# Altium PCB atWork_LCD.PcbDoc
Units mm, origin at the board's own origin, x right, y up, seen from the top; angles counter-clockwise.
Board outline 85.1 x 50.02 mm, 2 copper layers (Top Layer, Bottom Layer); 8 components, 15 nets, 44 pads, 7 vias.
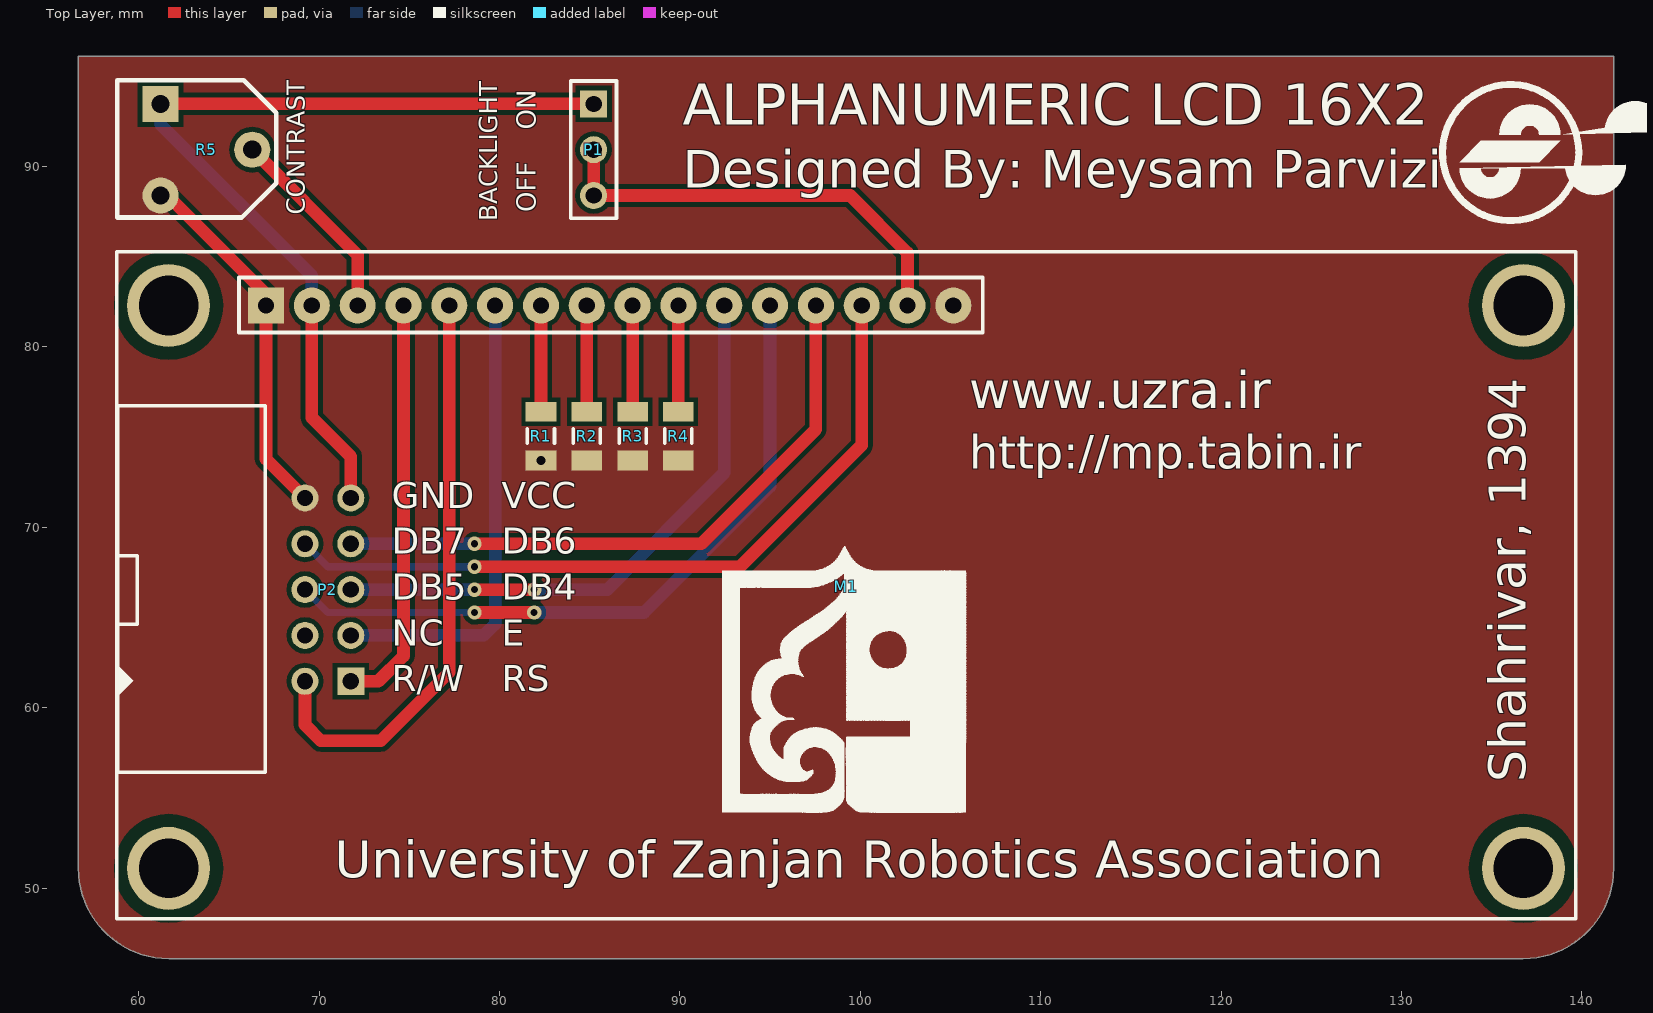
[diagram p0: Top Layer view]
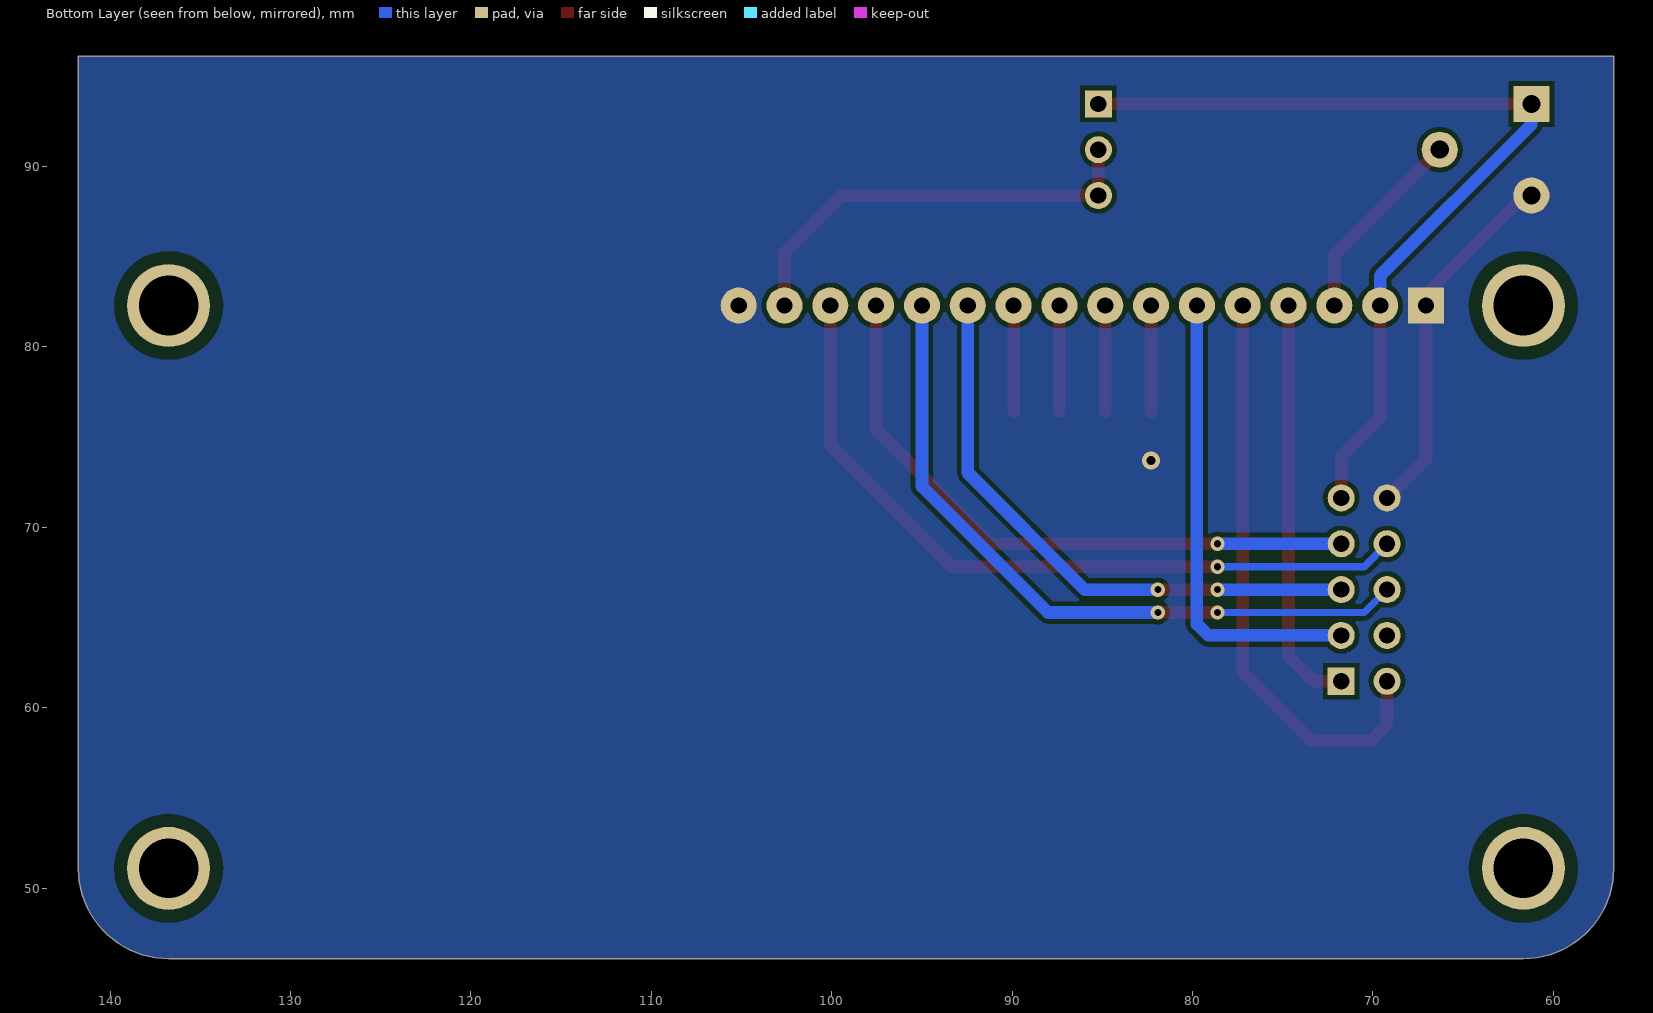
[diagram p1: Bottom Layer view, seen from below]

## Layer stack, top to bottom
Top Solder: solder mask 0.0102, Solder Resist, Dk 3.5
Top Layer: signal copper 0.0356
Dielectric 1: dielectric 0.32, FR-4, Dk 4.8
Bottom Layer: signal copper 0.0356
Bottom Solder: solder mask 0.0102, Solder Resist, Dk 3.5

## Board outline
56.656,51.096 ccw(c61.656,51.096) 61.656,46.096 136.756,46.096 ccw(c136.756,51.096) 141.756,51.096 141.756,96.115 56.656,96.115

## Design rules (kind name [scope] priority, off if disabled: settings)
Clearance [All] p1: gap=0.254
PolygonConnect [All] p1: connectstyle=Direct reliefconductorwidth=0.254 reliefentries=4 polygonreliefangle="90 Angle" airgapwidth=0.254
RoutingVias [All] p1: holewidth=0.711 width=1.27 viastyle="Through Hole" minholewidth=0.711 minwidth=1.27 maxholewidth=0.711 maxwidth=1.27
SolderMaskExpansion [All] p1: expansion=0.102
Width [All] p1: maxlimit=2 minlimit=0.254 preferedwidth=0.7 minimp=50.000000 maximp=50.000000 favimp=50.000000
30 further rules are at their usual default settings.

## Components (designator, comment, footprint, x,y, rotation, side; value= is the part's Value field where it differs from the comment)
M1 "LCD 16x2" LCD16PIN 67.056,82.296 r0 top
P1 "Header 3" HDR1X3 85.217,93.472 r270 top
P2 "Box 5X2" BOX2X5_RIGHT 69.215,66.548 r270 top
R1 "Res1" C1206 82.296,75.057 r270 top
R2 "Res1" C1206 84.836,75.057 r270 top
R3 "Res1" C1206 87.376,75.057 r270 top
R4 "Res1" C1206 89.916,75.057 r270 top
R5 "RPot" RPOT 61.214,93.472 r270 top

## Footprints (in the part's own frame and the unit in brackets; to place one, negate y for a bottom-side part, rotate by r counter-clockwise, add the part's x,y. Pads: shape width x height; smd on the part's side, far side on the other; paste and mask are expansions set on the pad)
BOX2X5_RIGHT [mm] "Box Header; 5x2 Position"
  rect 1.5x1.5 hole 0.9: 1(5.08,2.54)
  round 1.5 hole 0.9: 2(5.08,0) 3(2.54,2.54) 4(2.54,0) 5(0,2.54) 6(0,0) 7(-2.54,2.54) 8(-2.54,0) 9(-5.08,2.54) 10(-5.08,0)
  silkscreen extent -10.18,-10.39 10.12,-2.19, body extent -10.18,-10.39 10.12,-2.19, height 9
C1206 [mm] "Chip Capacitor, Body 3.2x1.6mm, IPC High Density"
  rect 1.1x1.7 smd: 1(-1.35,0) 2(1.35,0)
  silkscreen extent -0.4,-0.75 0.4,0.75, body extent -1.7,-0.9 1.7,0.9, height 1.3
HDR1X3 [mm] "Connector; Header; 3 Position"
  rect 1.5x1.5 hole 0.9: 1(0,0)
  round 1.5 hole 0.9: 2(2.54,0) 3(5.08,0)
  silkscreen extent -1.27,-1.27 6.35,1.27
LCD16PIN [mm] "16-pin 16 x 2 Liquid Crystal Display"
  round 4.6 hole 3.3: 0(-5.4,-31.2) 0(-5.4,0) 0(69.7,-31.2) 0(69.7,0)
  rect 2x2 hole 0.9: 1(0,0)
  round 2 hole 0.9: 2(2.54,0) 3(5.08,0) 4(7.62,0) 5(10.16,0) 6(12.7,0) 7(15.24,0) 8(17.78,0) 9(20.32,0) 10(22.86,0) 11(25.4,0) 12(27.94,0) 13(30.48,0) 14(33.02,0) 15(35.56,0) 16(38.1,0)
  silkscreen extent -8.28,-34 72.59,2.97, body extent -8.33,-34 72.67,3, height 19
RPOT [mm] "Potentiometer"
  rect 2x2 hole 1: 1(0,0)
  round 2 hole 1: 2(5.08,0) 3(2.54,5.08)
  silkscreen extent -1.3,-2.4 6.3,6.4, body extent -1.3,-2.4 6.3,6.4, height 5

## Part data
M1: "16-pin 16x2 Liquid Crystal Display"
P1: "Header, 3-Pin"
P2: "Box, 5-Pin, Dual row"
R1 R2 R3 R4: "Resistor"
R5: "Potentiometer"

## Via types
v1: diameter 0.8, hole 0.4, Top Layer to Bottom Layer, 6 vias
v2: diameter 1, hole 0.5, Top Layer to Bottom Layer, 1 vias

## Nets (pads, with @x,y where several pads share a name; then routed paths per layer and width w, separated by ;. In a path a pad name is that pad's centre, name@x,y a point inside that pad or via, vN(x,y) a via of type N, cw(c..) or ccw(c..) an arc to the next point about the centre after c; other vN are vias at no path point)
GND: M1.1 M1.16 P2.10 R1.2 R2.2 R3.2 R4.2 R5.2 | length 20.3
  Top Layer w0.7: R5.2 61.595,88.392 67.056,82.931 M1.1 67.056,73.787 P2.10
  other v2: 82.296,73.707
NetM1_3: M1.3 R5.3 | length 11.1
  Top Layer w0.7: R5.3 72.136,85.09 M1.3
NetM1_7: M1.7 R1.1 | length 5.9
  Top Layer w0.7: R1.1 M1.7
NetM1_8: M1.8 R2.1 | length 5.9
  Top Layer w0.7: R2.1 M1.8
NetM1_9: M1.9 R3.1 | length 5.9
  Top Layer w0.7: R3.1 M1.9
NetM1_10: M1.10 R4.1 | length 5.9
  Top Layer w0.7: R4.1 M1.10
NetM1_15: M1.15 P1.2 P1.3 | length 24.2
  Top Layer w0.7: P1.2 P1.3 99.441,88.392 102.616,85.217 M1.15
PA0: M1.4 P2.1 | length 22.9
  Top Layer w0.7: P2.1 73.279,61.468 74.676,62.865 M1.4
PA1: M1.5 P2.2 | length 32.7
  Top Layer w0.7: P2.2 69.215,59.055 70.104,58.166 73.406,58.166 77.216,61.976 M1.5
PA2: M1.6 P2.3 | length 25.9
  Bottom Layer w0.7: P2.3 79.121,64.008 79.756,64.643 M1.6
PA4: M1.11 P2.5 | length 32.7
  Top Layer w0.7: v1(78.613,66.548) v1(81.915,66.548)
  Bottom Layer w0.7: P2.5 v1(78.613,66.548) ; v1(81.915,66.548) 85.979,66.548 92.456,73.025 M1.11
PA5: M1.12 P2.6 | length 39.2
  Top Layer w0.7: v1(78.613,65.278) v1(81.915,65.278)
  Bottom Layer w0.4: P2.6 70.485,65.278 v1(78.613,65.278)
  Bottom Layer w0.7: v1(81.915,65.278) 88.011,65.278 94.996,72.263 M1.12
PA6: M1.13 P2.7 | length 35.3
  Top Layer w0.7: v1(78.613,69.088) 91.186,69.088 97.536,75.438 M1.13
  Bottom Layer w0.7: P2.7 v1(78.613,69.088)
PA7: M1.14 P2.8 | length 41.9
  Top Layer w0.7: v1(78.613,67.818) 93.345,67.818 100.076,74.549 M1.14
  Bottom Layer w0.4: P2.8 70.485,67.818 v1(78.613,67.818)
VCC: M1.2 P1.1 P2.9 R5.1 | length 50.2
  Top Layer w0.7: R5.1 P1.1 ; M1.2 69.596,76.073 71.755,73.914 P2.9
  Bottom Layer w0.7: R5.1 61.214,92.329 69.596,83.947 M1.2
pads on no net: M1.0 P2.4

## Polygon pours and split planes (outlines as drawn)
GND on Top Layer "Mechanical 1-No Net" (solid, pour order 4): 56.656,51.096 ccw(c61.656,51.096) 61.656,46.096 136.756,46.096 ccw(c136.756,51.096) 141.756,51.096 141.756,96.115 56.656,96.115
GND on Bottom Layer "Mechanical 1-No Net" (solid, pour order 2): 56.656,51.096 ccw(c61.656,51.096) 61.656,46.096 136.756,46.096 ccw(c136.756,51.096) 141.756,51.096 141.756,96.115 56.656,96.115

## Other copper
Top Layer:
  pour cut-out: 64.665,51.096 cw(c61.656,51.096) 61.656,48.087 cw(c61.656,51.096) 58.647,51.096 cw(c61.656,51.096) 61.656,54.105 cw(c61.656,51.096)
  pour cut-out: 136.756,54.105 cw(c136.756,51.096) 139.765,51.096 cw(c136.756,51.096) 136.756,48.087 cw(c136.756,51.096) 133.747,51.096 cw(c136.756,51.096)
  pour cut-out: 64.665,82.296 cw(c61.656,82.296) 61.656,79.287 cw(c61.656,82.296) 58.647,82.296 cw(c61.656,82.296) 61.656,85.305 cw(c61.656,82.296)
  pour cut-out: 139.765,82.296 cw(c136.756,82.296) 136.756,79.287 cw(c136.756,82.296) 133.747,82.296 cw(c136.756,82.296) 136.756,85.305 cw(c136.756,82.296)
Bottom Layer:
  pour cut-out: 64.665,51.096 cw(c61.656,51.096) 61.656,48.087 cw(c61.656,51.096) 58.647,51.096 cw(c61.656,51.096) 61.656,54.105 cw(c61.656,51.096)
  pour cut-out: 136.756,54.105 cw(c136.756,51.096) 139.765,51.096 cw(c136.756,51.096) 136.756,48.087 cw(c136.756,51.096) 133.747,51.096 cw(c136.756,51.096)
  pour cut-out: 64.665,82.296 cw(c61.656,82.296) 61.656,79.287 cw(c61.656,82.296) 58.647,82.296 cw(c61.656,82.296) 61.656,85.305 cw(c61.656,82.296)
  pour cut-out: 139.765,82.296 cw(c136.756,82.296) 136.756,79.287 cw(c136.756,82.296) 133.747,82.296 cw(c136.756,82.296) 136.756,85.305 cw(c136.756,82.296)

## Silkscreen, mask and mechanical layers (free items; w line width, h text height)
Top Overlay:
  drawing of 2362 lines, arcs and shapes, not listed
  text "ON" at 82.362,92.033 h1.8 r90
  text "ALPHANUMERIC LCD 16X2" at 90.17,91.567 h3.9
  text "Designed By: Meysam Parvizi" at 90.17,88.138 h3.58
  text "OFF" at 82.362,87.461 h1.8 r90
  text "CONTRAST" at 69.535,87.334 h1.7 r90
  text "BACKLIGHT" at 80.203,86.953 h1.7 r90
  text "www.uzra.ir" at 106.045,75.946 h3.5
  text "http://mp.tabin.ir" at 106.045,72.644 h3.2
  text "GND" at 74.033,70.57 h2.5
  text "VCC" at 80.129,70.57 h2.5
  text "DB7" at 74.033,68.03 h2.5
  text "DB6" at 80.129,68.03 h2.5
  text "DB5" at 74.033,65.49 h2.5
  text "DB4" at 80.129,65.49 h2.5
  text "NC" at 74.033,62.95 h2.5
  text "E" at 80.129,62.95 h2.5
  text "R/W" at 74.033,60.41 h2.5
  text "RS" at 80.129,60.41 h2.5
  text "Shahrivar, 1394" at 137.541,55.88 h3.5 r90
  text "University of Zanjan Robotics Association" at 70.866,49.911 h3.5
Mechanical 1:
  lines w0.254: 56.656,96.101 56.656,51.096 ccw(c61.656,51.096) 61.656,46.096 136.756,46.096 ccw(c136.756,51.096) 141.756,51.096 141.756,96.115 56.656,96.115